# Altium PCB SW6124Demo board.PcbDoc (part 2 of 3)
Units mm, origin at the board's own origin, x right, y up, seen from the top; angles counter-clockwise.
Board outline 64 x 25.82 mm, 4 copper layers (Top Layer, Signal, power, Bottom Layer); 54 components, 46 nets, 211 pads, 291 vias.
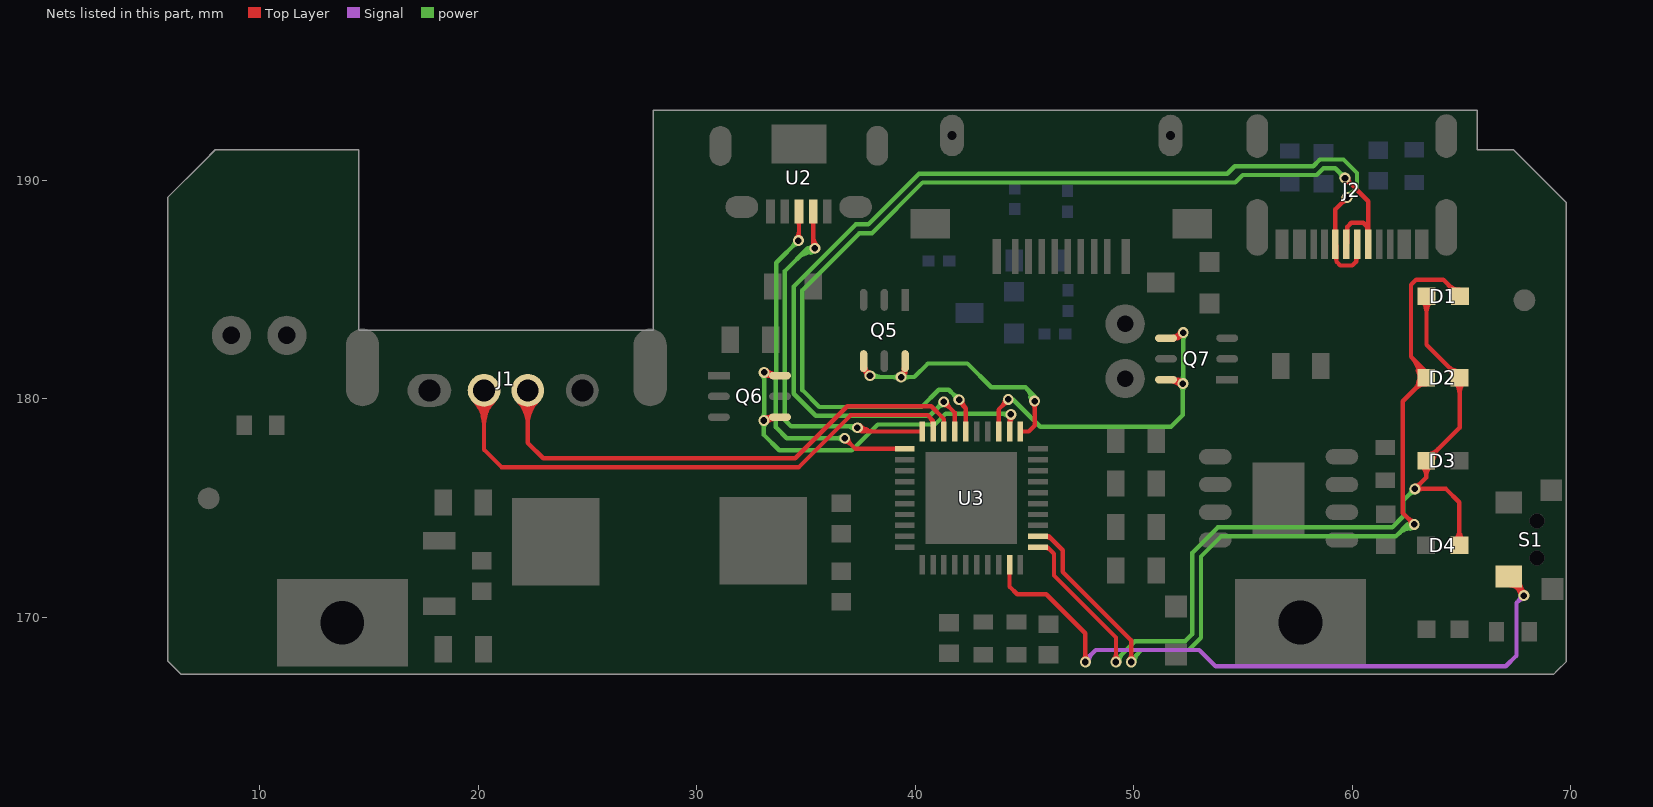
[diagram p4: the nets of this part, all layers, seen from the top]

## Via types
v1: diameter 0.5, hole 0.3, Top Layer to Bottom Layer, tented both sides, 242 vias
v2: diameter 0.508, hole 0.305, Top Layer to Bottom Layer, tented both sides, 49 vias

## Nets (pads, with @x,y where several pads share a name; then routed paths per layer and width w, separated by ;. In a path a pad name is that pad's centre, name@x,y a point inside that pad or via, vN(x,y) a via of type N, cw(c..) or ccw(c..) an arc to the next point about the centre after c; other vN are vias at no path point) (continued)
DMA: J1.2 U3.38 | length 36.1
  Top Layer w0.2: J1.2@22.273,180.379 22.273,177.977 22.98,177.27 34.517,177.27 36.897,179.65 40.736,179.65 41.32,179.066 U3.38@41.32,178.5 ; J1.2@21.813,179.92 cw(c20.703,178.81) 22.273,178.81 ; J1.2@21.813,179.92 cw(c20.703,178.81) 22.273,178.81 ; J1.2@21.813,179.92 cw(c20.703,178.81) 22.273,178.81 ; J1.2@21.954,180.061 cw(c21.186,179.293) 22.273,179.293 ; J1.2@21.954,180.061 cw(c21.186,179.293) 22.273,179.293 ; J1.2@21.954,180.061 cw(c21.186,179.293) 22.273,179.293 ; 22.273,178.81 cw(c23.842,178.81) J1.2@22.732,179.92 ; 22.273,178.81 cw(c23.842,178.81) J1.2@22.732,179.92 ; 22.273,178.81 cw(c23.842,178.81) J1.2@22.732,179.92 ; 22.273,179.293 cw(c23.359,179.293) J1.2@22.591,180.061 ; 22.273,179.293 cw(c23.359,179.293) J1.2@22.591,180.061 ; 22.273,179.293 cw(c23.359,179.293) J1.2@22.591,180.061
DMB: U2.2 U3.40 | length 29
  Top Layer w0.2: U2.2@35.334,188.559 35.334,186.966 v1(35.415,186.885) ; v1(37.36,178.67) 37.53,178.5 U3.40@40.32,178.5 ; 35.334,187.967 cw(c35.576,187.967) 35.405,188.138 ccw(c35.576,187.967) 35.334,187.967 ; 35.334,187.967 ccw(c35.093,187.967) 35.263,188.138 cw(c35.093,187.967) 35.334,187.967 ; v1@37.325,178.635 ccw(c37.65,178.96) 37.65,178.5 ; v1@37.325,178.635 ccw(c37.65,178.96) 37.65,178.5 ; v1@37.325,178.635 ccw(c37.65,178.96) 37.65,178.5 ; v1@37.451,178.551 cw(c37.651,178.288) 37.816,178.574 ; v1@37.451,178.551 cw(c37.651,178.288) 37.816,178.574 ; v1@37.451,178.551 cw(c37.651,178.288) 37.816,178.574 ; v1@37.466,178.776 ccw(c38.133,179.443) 38.133,178.5 ; v1@37.466,178.776 ccw(c38.133,179.443) 38.133,178.5 ; v1@37.466,178.776 ccw(c38.133,179.443) 38.133,178.5 ; 35.334,187.442 ccw(c35.972,187.442) 35.521,186.991 cw(c35.972,187.442) 35.334,187.442
  power w0.2: 34.765,186.561 ccw(c34.543,187.388) v1@35.285,186.96 ; 35.156,186.866 cw(c35.186,186.757) v1@35.284,186.812 ; 35.231,186.686 ccw(c35.134,187.047) v1@35.458,186.86 ; v1(35.415,186.885) 35.084,186.885 ; v1(37.36,178.67) 37.29,178.74 34.325,178.74 34.03,179.035 34.03,180.797 34.04,180.807 34.04,185.841 35.084,186.885 ; 35.084,186.885 cw(c35.084,186.594) 35.302,186.786 ccw(c35.084,186.594) 35.084,186.885 ; 35.084,186.885 ccw(c35.084,187.176) 35.302,186.984 cw(c35.084,187.176) 35.084,186.885 ; 34.594,186.395 cw(c35.415,185.573) 35.415,186.735 ccw(c35.415,185.573) 34.594,186.395 ; 34.935,186.736 cw(c35.415,186.256) 35.415,186.935 ccw(c35.415,186.256) 34.935,186.736 ; 36.829,178.74 cw(c36.829,178.139) 37.254,178.564 ccw(c36.829,178.139) 36.829,178.74
DMC: J2.A7 J2.B7 U3.36 | length 56.6
  Top Layer w0.2: v1(42.01,179.95) 42.01,179.872 42.32,179.562 ; U3.36@42.32,178.5 42.32,179.562 ; v1(59.672,190.097) 60.733,189.036 J2.B7@60.733,187.071 60.683,187.121 60.683,187.871 60.507,188.046 59.958,188.046 59.783,187.871 59.783,187.121 J2.A7@59.733,187.071 ; v1@59.676,189.947 cw(c59.684,189.615) 59.922,189.847 ; v1@59.822,190.093 ccw(c60.154,190.085) 59.922,189.847 ; v1@42.16,179.95 ccw(c42.706,179.948) 42.32,179.562 ; v1@42.16,179.95 ccw(c42.706,179.948) 42.32,179.562 ; v1@42.16,179.95 ccw(c42.706,179.948) 42.32,179.562 ; v1@59.673,189.947 cw(c59.676,189.595) 59.928,189.841 ; v1@59.674,189.947 cw(c59.678,189.599) 59.921,189.848 ccw(c59.678,189.599) v1@59.674,189.947 ; v1@59.822,190.095 ccw(c60.17,190.091) 59.921,189.848 cw(c60.17,190.091) v1@59.822,190.095 ; v1@59.822,190.096 ccw(c60.174,190.093) 59.928,189.841 ; 59.928,189.841 cw(c60.184,190.097) 59.822,190.097 ccw(c60.184,190.097) 59.928,189.841 ; 59.928,189.841 ccw(c59.672,189.585) 59.672,189.947 cw(c59.672,189.585) 59.928,189.841 ; J2.A7@59.697,187.632 ccw(c59.491,187.838) 59.783,187.838 cw(c59.491,187.838) J2.A7@59.697,187.632 ; 60.683,187.838 ccw(c60.974,187.838) 60.768,187.632 cw(c60.974,187.838) 60.683,187.838
  power w0.2: v1(42.01,179.95) 41.812,180.148 41.8,180.148 41.538,180.41 41.082,180.41 40.292,179.62 35.614,179.62 34.84,180.394 34.84,184.967 37.448,187.575 38.026,187.575 40.341,189.89 54.649,189.89 54.995,190.236 58.38,190.236 58.688,190.544 59.225,190.544 v1(59.672,190.097) ; v1@59.522,190.098 ccw(c59.17,190.101) 59.416,190.353 ; v1@59.522,190.099 ccw(c59.174,190.103) 59.423,190.346 ccw(c59.666,190.595) 59.67,190.247 cw(c59.668,190.599) 59.416,190.353 ; 59.416,190.353 cw(c59.16,190.097) 59.522,190.097 ccw(c59.16,190.097) 59.416,190.353 ; 59.416,190.353 ccw(c59.672,190.609) 59.672,190.247 cw(c59.672,190.609) 59.416,190.353 ; 41.733,180.215 ccw(c42.01,180.492) 42.01,180.1 cw(c42.01,180.492) 41.733,180.215 ; 41.763,180.185 cw(c41.527,179.95) 41.86,179.95 ccw(c41.527,179.95) 41.763,180.185
DPA: J1.3 U3.39 | length 38.8
  Top Layer w0.2: J1.3@20.273,180.379 20.273,177.67 21.073,176.87 34.682,176.87 37.062,179.25 40.57,179.25 40.82,179 U3.39@40.82,178.5 ; J1.3@19.813,179.92 cw(c18.703,178.81) 20.273,178.81 ; J1.3@19.813,179.92 cw(c18.703,178.81) 20.273,178.81 ; J1.3@19.813,179.92 cw(c18.703,178.81) 20.273,178.81 ; J1.3@19.954,180.061 cw(c19.186,179.293) 20.273,179.293 ; J1.3@19.954,180.061 cw(c19.186,179.293) 20.273,179.293 ; J1.3@19.954,180.061 cw(c19.186,179.293) 20.273,179.293 ; 20.273,178.81 cw(c21.842,178.81) J1.3@20.732,179.92 ; 20.273,178.81 cw(c21.842,178.81) J1.3@20.732,179.92 ; 20.273,178.81 cw(c21.842,178.81) J1.3@20.732,179.92 ; 20.273,179.293 cw(c21.359,179.293) J1.3@20.591,180.061 ; 20.273,179.293 cw(c21.359,179.293) J1.3@20.591,180.061 ; 20.273,179.293 cw(c21.359,179.293) J1.3@20.591,180.061 ; 40.654,179.166 cw(c40.312,178.825) U3.39@40.795,178.825 ; 40.654,179.166 cw(c40.312,178.825) U3.39@40.795,178.825 ; 40.654,179.166 cw(c40.312,178.825) U3.39@40.795,178.825
DPB: U2.3 U3.1 | length 34.1
  Top Layer w0.2: v1@34.551,187.342 ccw(c34.229,187.664) 34.684,187.664 ; v1(34.657,187.236) 34.684,187.263 U2.3@34.684,188.559 ; 34.684,187.532 ccw(c34.953,187.532) v1@34.763,187.342 ; v1(36.78,178.19) 37.27,177.7 U3.1@39.52,177.7 ; 34.684,187.967 cw(c34.926,187.967) 34.755,188.138 ccw(c34.926,187.967) 34.684,187.967 ; 34.684,187.967 ccw(c34.443,187.967) 34.613,188.138 cw(c34.443,187.967) 34.684,187.967 ; v1@36.78,178.04 cw(c36.78,177.678) 37.036,177.934 ; v1@36.78,178.04 cw(c36.78,177.678) 37.036,177.934 ; v1@36.78,178.04 cw(c36.78,177.678) 37.036,177.934 ; v1@36.78,178.04 cw(c36.78,177.678) 37.036,177.934 cw(c37.292,178.19) v1@36.93,178.19 ; v1@36.78,178.04 cw(c36.78,177.678) 37.036,177.934 ; v1@36.782,178.04 cw(c36.786,177.692) 37.029,177.941 ; v1@36.782,178.04 cw(c36.786,177.692) 37.029,177.941 ; v1@36.781,178.04 cw(c36.784,177.688) 37.036,177.934 ; v1@36.781,178.04 cw(c36.784,177.688) 37.036,177.934 ; v1@36.782,178.04 cw(c36.786,177.692) 37.029,177.941 ; v1@36.782,178.04 cw(c36.786,177.692) 37.029,177.941 ; v1@36.782,178.04 cw(c36.786,177.692) 37.029,177.941 ; v1@36.782,178.04 cw(c36.786,177.692) 37.029,177.941 ; v1@36.781,178.04 cw(c36.784,177.688) 37.036,177.934 ; v1@36.783,178.04 cw(c36.789,177.699) 37.03,177.94 ; v1@36.782,178.04 cw(c36.787,177.695) 37.028,177.942 ; v1@36.782,178.04 cw(c36.787,177.695) 37.028,177.942 ; v1@36.783,178.04 cw(c36.788,177.698) 37.03,177.94 ; v1@36.784,178.04 cw(c36.792,177.708) 37.03,177.94 ; v1@36.784,178.04 cw(c36.792,177.708) 37.03,177.94 ; v1@36.784,178.04 cw(c36.793,177.709) 37.03,177.94 ; v1@36.784,178.04 cw(c36.793,177.709) 37.03,177.94 ; v1@36.784,178.04 cw(c36.792,177.708) 37.03,177.94 ; v1@36.93,178.186 ccw(c37.262,178.178) 37.03,177.94 ; v1@36.93,178.186 ccw(c37.262,178.178) 37.03,177.94 ; v1@36.93,178.186 ccw(c37.261,178.177) 37.03,177.94 ; v1@36.93,178.186 ccw(c37.261,178.177) 37.03,177.94 ; v1@36.93,178.186 ccw(c37.262,178.178) 37.03,177.94 ; v1@36.93,178.188 ccw(c37.278,178.184) 37.029,177.941 ; v1@36.93,178.188 ccw(c37.278,178.184) 37.029,177.941 ; v1@36.93,178.188 ccw(c37.278,178.184) 37.029,177.941 ; v1@36.93,178.188 ccw(c37.278,178.184) 37.029,177.941 ; v1@36.93,178.187 ccw(c37.272,178.182) 37.03,177.94 ; v1@36.93,178.188 ccw(c37.275,178.183) 37.028,177.942 ; v1@36.93,178.188 ccw(c37.275,178.183) 37.028,177.942 ; v1@36.93,178.187 ccw(c37.271,178.181) 37.03,177.94 ; v1@36.93,178.188 ccw(c37.278,178.184) 37.029,177.941 ; v1@36.93,178.188 ccw(c37.278,178.184) 37.029,177.941 ; v1@36.93,178.189 ccw(c37.282,178.186) 37.036,177.934 ; v1@36.93,178.189 ccw(c37.282,178.186) 37.036,177.934 ; v1@36.93,178.189 ccw(c37.282,178.186) 37.036,177.934 ; v1@36.93,178.19 ccw(c37.292,178.19) 37.036,177.934 ; v1@36.93,178.19 ccw(c37.292,178.19) 37.036,177.934 ; v1@36.93,178.19 ccw(c37.292,178.19) 37.036,177.934 ; v1@36.93,178.19 ccw(c37.292,178.19) 37.036,177.934
  power w0.2: v1@34.507,187.234 cw(c34.159,187.23) 34.408,186.987 cw(c34.651,186.738) 34.655,187.086 ccw(c34.653,186.734) 34.401,186.98 ; v1@34.507,187.235 cw(c34.155,187.232) 34.401,186.98 ; v1(34.657,187.236) 33.64,186.219 33.64,180.972 33.63,180.962 33.63,178.69 34.13,178.19 v1(36.78,178.19) ; 34.401,186.98 cw(c34.657,186.724) 34.657,187.086 ccw(c34.657,186.724) 34.401,186.98 ; 34.401,186.98 ccw(c34.145,187.236) 34.507,187.236 cw(c34.145,187.236) 34.401,186.98 ; 36.418,178.19 cw(c36.418,177.828) 36.674,178.084 ccw(c36.418,177.828) 36.418,178.19 ; 36.418,178.19 ccw(c36.418,178.552) 36.674,178.296 cw(c36.418,178.552) 36.418,178.19
DPC: J2.A6 J2.B6 U3.37 | length 69.7
  Top Layer w0.2: v1(41.31,179.86) 41.82,179.35 U3.37@41.82,178.5 ; v1@59.618,189.201 cw(c59.286,189.193) 59.518,188.955 cw(c59.756,188.723) v1@59.764,189.055 ; v1@59.767,189.055 ccw(c59.764,188.703) 59.512,188.949 ; v1(59.768,189.205) 59.233,188.67 J2.B6@59.233,187.071 59.283,187.021 59.283,186.272 59.458,186.096 60.007,186.096 60.183,186.272 J2.A6@60.183,186.468 ; v1@41.31,179.71 cw(c41.31,179.348) 41.566,179.604 ; v1@41.31,179.71 cw(c41.31,179.348) 41.566,179.604 ; v1@41.31,179.71 cw(c41.31,179.348) 41.566,179.604 ; v1@41.31,179.71 cw(c41.31,179.348) 41.566,179.604 ; v1@41.31,179.71 cw(c41.31,179.348) 41.566,179.604 ; v1@41.312,179.71 cw(c41.316,179.362) 41.559,179.611 ; v1@41.312,179.71 cw(c41.316,179.362) 41.559,179.611 ; v1@41.311,179.71 cw(c41.314,179.358) 41.566,179.604 ; v1@41.311,179.71 cw(c41.314,179.358) 41.566,179.604 ; v1@41.312,179.71 cw(c41.316,179.362) 41.559,179.611 ; v1@41.312,179.71 cw(c41.316,179.362) 41.559,179.611 ; v1@41.312,179.71 cw(c41.317,179.365) 41.558,179.612 ; v1@41.312,179.71 cw(c41.317,179.365) 41.558,179.612 ; v1@41.312,179.71 cw(c41.316,179.362) 41.559,179.611 ; v1@41.312,179.71 cw(c41.316,179.362) 41.559,179.611 ; v1@41.311,179.71 cw(c41.314,179.358) 41.566,179.604 ; v1@41.314,179.71 cw(c41.322,179.378) 41.56,179.61 ; v1@41.314,179.71 cw(c41.322,179.378) 41.56,179.61 ; v1@41.314,179.71 cw(c41.323,179.379) 41.56,179.61 ; v1@41.314,179.71 cw(c41.323,179.379) 41.56,179.61 ; v1@41.314,179.71 cw(c41.322,179.378) 41.56,179.61 ; v1@41.46,179.856 ccw(c41.792,179.848) 41.56,179.61 ; v1@41.46,179.856 ccw(c41.792,179.848) 41.56,179.61 ; v1@41.46,179.856 ccw(c41.791,179.847) 41.56,179.61 ; v1@41.46,179.856 ccw(c41.791,179.847) 41.56,179.61 ; v1@41.46,179.856 ccw(c41.792,179.848) 41.56,179.61 ; v1@41.46,179.858 ccw(c41.808,179.854) 41.559,179.611 ; v1@41.46,179.858 ccw(c41.808,179.854) 41.559,179.611 ; v1@41.46,179.858 ccw(c41.808,179.854) 41.559,179.611 ; v1@41.46,179.858 ccw(c41.808,179.854) 41.559,179.611 ; v1@41.46,179.857 ccw(c41.802,179.852) 41.56,179.61 ; v1@41.46,179.858 ccw(c41.805,179.853) 41.558,179.612 ; v1@41.46,179.858 ccw(c41.805,179.853) 41.558,179.612 ; v1@41.46,179.857 ccw(c41.801,179.851) 41.56,179.61 ; v1@41.46,179.858 ccw(c41.808,179.854) 41.559,179.611 ; v1@41.46,179.858 ccw(c41.808,179.854) 41.559,179.611 ; v1@41.46,179.859 ccw(c41.812,179.856) 41.566,179.604 ; v1@41.46,179.859 ccw(c41.812,179.856) 41.566,179.604 ; v1@41.46,179.859 ccw(c41.812,179.856) 41.566,179.604 ; v1@41.46,179.86 ccw(c41.822,179.86) 41.566,179.604 ; v1@41.46,179.86 ccw(c41.822,179.86) 41.566,179.604 ; v1@41.46,179.86 ccw(c41.822,179.86) 41.566,179.604 ; v1@41.46,179.86 ccw(c41.822,179.86) 41.566,179.604 ; v1@41.46,179.86 ccw(c41.822,179.86) 41.566,179.604 ; 41.56,179.61 ccw(c41.319,179.369) 41.313,179.71 cw(c41.318,179.368) 41.56,179.61 ; 59.512,188.949 cw(c59.768,188.693) 59.768,189.055 ccw(c59.768,188.693) 59.512,188.949 ; 59.512,188.949 ccw(c59.256,189.205) 59.618,189.205 cw(c59.256,189.205) 59.512,188.949 ; 59.512,188.949 ccw(c59.266,189.201) v1@59.618,189.204 ; 59.519,188.956 cw(c59.762,188.707) 59.766,189.055 ccw(c59.762,188.707) 59.519,188.956 ; 59.519,188.956 ccw(c59.27,189.199) v1@59.618,189.203 ; 59.519,188.956 ccw(c59.27,189.199) v1@59.618,189.203 ; J2.B6@59.197,186.511 cw(c58.991,186.305) 59.283,186.305 ccw(c58.991,186.305) J2.B6@59.197,186.511 ; 60.183,186.305 cw(c60.474,186.305) 60.268,186.511 ccw(c60.474,186.305) 60.183,186.305
  power w0.2: v1@41.16,179.858 cw(c40.812,179.854) 41.061,179.611 cw(c41.304,179.362) v1@41.308,179.71 ; v1@41.16,179.859 cw(c40.808,179.856) 41.054,179.604 ; v1@41.309,179.71 ccw(c41.306,179.358) 41.054,179.604 ; v1(41.31,179.86) 40.67,179.22 35.448,179.22 34.44,180.228 34.44,185.132 37.283,187.975 37.86,187.975 40.175,190.29 54.278,190.29 54.624,190.636 58.215,190.636 58.523,190.944 59.603,190.944 60.222,190.325 60.222,189.659 v1(59.768,189.205) ; 41.054,179.604 cw(c41.31,179.348) 41.31,179.71 ccw(c41.31,179.348) 41.054,179.604 ; 41.054,179.604 ccw(c40.798,179.86) 41.16,179.86 cw(c40.798,179.86) 41.054,179.604 ; 60.024,189.461 cw(c59.768,189.717) 59.768,189.355 ccw(c59.768,189.717) 60.024,189.461 ; 60.024,189.461 ccw(c60.28,189.205) 59.918,189.205 cw(c60.28,189.205) 60.024,189.461 ; 60.024,189.461 ccw(c60.27,189.209) 59.918,189.206 cw(c60.266,189.211) 60.017,189.454 cw(c59.774,189.703) 59.77,189.355 ccw(c59.772,189.707) 60.024,189.461
GATE_A: Q6.4 Q6.6 U3.32 | length 42.6
  Top Layer w0.2: v1(33.08,179) 33.237,179.157 Q6.4@33.818,179.157 ; v1(33.09,181.2) 33.234,181.056 Q6.6@33.818,181.056 ; v1@33.143,179.136 ccw(c33.253,179.377) Q6.4@33.386,179.148 ; v1@33.225,178.961 cw(c33.492,178.89) Q6.4@33.354,179.129 ; v1@33.225,178.963 cw(c33.414,178.914) Q6.4@33.414,179.109 ; 33.314,179.106 ccw(c33.265,179.288) Q6.4@33.428,179.194 ; 33.324,179.109 cw(c33.369,178.941) Q6.4@33.456,179.092 ; U3.32@44.32,178.5 44.32,179.22 v1(44.38,179.28) ; v1@33.045,179.035 cw(c33.337,178.744) Q6.4@33.337,179.157 ; v1@33.045,179.035 cw(c33.337,178.744) Q6.4@33.337,179.157 ; v1@33.045,179.035 cw(c33.337,178.744) Q6.4@33.337,179.157 ; v1@33.055,181.165 ccw(c33.316,181.426) 33.316,181.056 ; v1@33.055,181.165 ccw(c33.316,181.426) 33.316,181.056 ; v1@33.055,181.165 ccw(c33.316,181.426) 33.316,181.056 ; v1@33.156,179.129 ccw(c33.23,179.254) Q6.4@33.355,179.18 ; v1@33.156,179.129 ccw(c33.23,179.254) Q6.4@33.355,179.18 ; v1@33.156,179.129 ccw(c33.23,179.254) Q6.4@33.355,179.18 ; v1@33.156,179.129 ccw(c33.23,179.254) Q6.4@33.355,179.18 ; v1@33.177,179.114 ccw(c33.367,179.338) Q6.4@33.514,179.084 ; v1@33.177,179.114 ccw(c33.367,179.338) Q6.4@33.514,179.084 ; v1@33.177,179.114 ccw(c33.367,179.338) Q6.4@33.514,179.084 ; v1@33.186,178.894 cw(c33.818,178.264) Q6.4@33.818,179.157 ; v1@33.186,178.894 cw(c33.818,178.264) Q6.4@33.818,179.157 ; v1@33.186,178.894 cw(c33.818,178.264) Q6.4@33.818,179.157 ; v1@33.196,181.306 ccw(c33.799,181.909) Q6.6@33.799,181.056 ; v1@33.196,181.306 ccw(c33.799,181.909) Q6.6@33.799,181.056 ; v1@33.196,181.306 ccw(c33.799,181.909) Q6.6@33.799,181.056 ; v1@33.213,179.123 cw(c33.296,178.815) Q6.4@33.456,179.092 ; v1@33.213,179.123 cw(c33.296,178.815) Q6.4@33.456,179.092 ; v1@33.213,179.123 cw(c33.296,178.815) Q6.4@33.456,179.092 ; v1@33.224,178.96 cw(c33.553,178.868) Q6.4@33.465,179.197 ; v1@33.224,178.96 cw(c33.553,178.868) Q6.4@33.465,179.197 ; v1@33.224,178.96 cw(c33.553,178.868) Q6.4@33.465,179.197 ; v1@33.224,178.96 cw(c33.553,178.868) Q6.4@33.465,179.197 ; v1@33.224,178.96 cw(c33.553,178.868) Q6.4@33.465,179.197 ; v1@33.224,178.96 cw(c33.553,178.868) Q6.4@33.465,179.197 ; v1@33.229,178.987 cw(c33.379,178.974) Q6.4@33.379,179.123 ; v1@33.229,178.987 cw(c33.379,178.974) Q6.4@33.379,179.123 ; v1@33.229,178.987 cw(c33.379,178.974) Q6.4@33.379,179.123 ; v1@33.229,178.987 cw(c33.379,178.974) Q6.4@33.379,179.123 ; v1@33.236,181.236 ccw(c33.525,181.308) Q6.6@33.448,181.02 ; v1@33.236,181.236 ccw(c33.525,181.308) Q6.6@33.448,181.02 ; v1@33.236,181.236 ccw(c33.525,181.308) Q6.6@33.448,181.02 ; v1@33.236,181.236 ccw(c33.525,181.308) Q6.6@33.448,181.02 ; v1@33.236,181.236 ccw(c33.525,181.308) Q6.6@33.448,181.02 ; v1@33.236,181.236 ccw(c33.525,181.308) Q6.6@33.448,181.02 ; 33.312,179.157 cw(c33.312,178.975) Q6.4@33.44,179.103 ; 33.312,179.157 ccw(c33.312,179.338) Q6.4@33.44,179.21 ; 33.312,179.157 ccw(c33.312,179.338) Q6.4@33.44,179.21 ; 33.312,179.157 cw(c33.312,178.975) Q6.4@33.44,179.103 ; 33.312,179.157 ccw(c33.312,179.338) Q6.4@33.44,179.21 ; 33.312,179.157 cw(c33.312,178.975) Q6.4@33.44,179.103 ; 33.312,181.056 cw(c33.312,180.875) Q6.6@33.44,181.003 ; 33.312,181.056 ccw(c33.312,181.238) Q6.6@33.44,181.11 ; 33.312,181.056 ccw(c33.312,181.238) Q6.6@33.44,181.11 ; 33.312,181.056 cw(c33.312,180.875) Q6.6@33.44,181.003 ; 33.312,181.056 ccw(c33.312,181.238) Q6.6@33.44,181.11 ; 33.312,181.056 cw(c33.312,180.875) Q6.6@33.44,181.003 ; U3.32@44.32,178.773 cw(c44.887,178.773) v1@44.486,179.174 ; U3.32@44.32,178.773 cw(c44.887,178.773) v1@44.486,179.174 ; U3.32@44.32,178.773 cw(c44.887,178.773) v1@44.486,179.174 ; v1@33.193,181.091 cw(c33.374,180.899) 33.506,181.127 ccw(c33.374,180.899) v1@33.193,181.091
  power w0.2: v1(33.08,179) 33.08,178.34 33.78,177.64 37.108,177.64 38.288,178.82 40.905,178.82 41.395,179.31 44.35,179.31 v1(44.38,179.28) ; v1@33.08,179.15 33.09,179.16 v1(33.09,181.2) ; v1@32.974,178.894 cw(c32.718,178.638) 33.08,178.638 ; v1@32.974,178.894 cw(c32.718,178.638) 33.08,178.638 ; v1@32.974,178.894 cw(c32.718,178.638) 33.08,178.638 ; v1@32.974,179.106 ccw(c32.694,179.386) 33.09,179.386 ; v1@32.974,179.106 ccw(c32.694,179.386) 33.09,179.386 ; v1@32.974,179.106 ccw(c32.694,179.386) 33.09,179.386 ; v1@32.984,181.094 cw(c32.728,180.838) 33.09,180.838 ; v1@32.984,181.094 cw(c32.728,180.838) 33.09,180.838 ; v1@32.984,181.094 cw(c32.728,180.838) 33.09,180.838 ; 33.08,178.638 cw(c33.442,178.638) v1@33.186,178.894 ; 33.08,178.638 cw(c33.442,178.638) v1@33.186,178.894 ; 33.08,178.638 cw(c33.442,178.638) v1@33.186,178.894 ; 33.09,179.338 ccw(c33.418,179.338) v1@33.186,179.106 ; 33.09,179.338 ccw(c33.418,179.338) v1@33.186,179.106 ; 33.09,179.338 ccw(c33.418,179.338) v1@33.186,179.106 ; 33.09,180.838 cw(c33.452,180.838) v1@33.196,181.094 ; 33.09,180.838 cw(c33.452,180.838) v1@33.196,181.094 ; 33.09,180.838 cw(c33.452,180.838) v1@33.196,181.094 ; 43.945,179.31 cw(c43.945,178.845) v1@44.274,179.174 ; 43.945,179.31 cw(c43.945,178.845) v1@44.274,179.174 ; 43.945,179.31 cw(c43.945,178.845) v1@44.274,179.174 ; 44.09,179.31 ccw(c44.09,179.57) v1@44.274,179.386 ; 44.09,179.31 ccw(c44.09,179.57) v1@44.274,179.386 ; 44.09,179.31 ccw(c44.09,179.57) v1@44.274,179.386
GATE_B: Q5.4 Q5.6 U3.31 | length 30.3
  Top Layer w0.2: Q5.4@37.605,181.33 cw(c37.374,180.93) v1@37.821,181.049 ; Q5.4@37.614,181.326 cw(c37.487,181.022) v1@37.805,181.107 ; Q5.4@37.643,181.32 cw(c37.643,181.105) 37.795,181.257 ; Q5.4@37.643,181.72 37.643,181.34 v1(37.934,181.049) ; Q5.4@37.643,181.345 cw(c37.5,181.096) v1@37.785,181.065 ; Q5.4@37.673,181.305 ccw(c37.868,181.418) 37.907,181.197 cw(c37.873,181.398) Q5.4@37.696,181.296 ; Q5.4@37.717,181.409 ccw(c38.03,181.471) v1@37.87,181.194 ; Q5.4@37.74,181.289 cw(c37.67,181.168) v1@37.797,181.111 ; Q5.4@37.753,181.311 cw(c37.619,181.177) v1@37.795,181.105 ; v1@37.784,181.053 ccw(c37.452,181.061) 37.684,181.299 ccw(c37.922,181.531) v1@37.93,181.199 ; v1@37.933,181.199 cw(c37.93,181.551) Q5.4@37.678,181.305 ; Q5.6@39.543,181.72 39.543,181.175 ; U3.31@44.82,178.5 45.2,178.5 45.47,178.77 v1@45.47,179.7 ; Q5.4@37.678,181.305 cw(c37.422,181.049) 37.784,181.049 ccw(c37.422,181.049) Q5.4@37.678,181.305 ; Q5.4@37.678,181.305 ccw(c37.934,181.561) 37.934,181.199 cw(c37.934,181.561) Q5.4@37.678,181.305 ; Q5.4@37.678,181.305 cw(c37.432,181.053) v1@37.784,181.05 ; Q5.4@37.685,181.298 cw(c37.436,181.055) v1@37.784,181.051 ; Q5.4@37.685,181.298 cw(c37.436,181.055) v1@37.784,181.051 ; Q5.4@37.685,181.298 ccw(c37.928,181.547) 37.932,181.199 cw(c37.928,181.547) Q5.4@37.685,181.298 ; Q5.4@37.716,181.336 ccw(c37.955,181.474) v1@37.941,181.199 ; Q5.4@37.716,181.336 ccw(c37.955,181.474) v1@37.941,181.199 ; Q5.4@37.716,181.336 ccw(c37.955,181.474) v1@37.941,181.199 ; 37.768,181.245 cw(c37.589,181.141) v1@37.789,181.088 ; 37.768,181.245 cw(c37.589,181.141) v1@37.789,181.088 ; 37.768,181.245 cw(c37.589,181.141) v1@37.789,181.088 ; v1(39.358,180.99) ccw(c39.063,181.285) 39.47,181.378 cw(c39.063,181.285) v1(39.358,180.99) ; v1(39.358,180.99) 39.543,181.175 ; 39.543,181.175 cw(c39.435,181.283) 39.396,181.135 ccw(c39.435,181.283) 39.543,181.175 ; 39.543,181.175 ccw(c39.651,181.067) 39.503,181.028 cw(c39.651,181.067) 39.543,181.175 ; 39.543,181.214 cw(c39.724,181.214) 39.596,181.342 ccw(c39.724,181.214) 39.543,181.214 ; 39.543,181.214 ccw(c39.362,181.214) 39.49,181.342 cw(c39.362,181.214) 39.543,181.214 ; v1@45.364,179.784 cw(c45.108,179.528) 45.47,179.528 ; v1@45.364,179.784 cw(c45.108,179.528) 45.47,179.528 ; v1@45.364,179.784 cw(c45.108,179.528) 45.47,179.528 ; 45.47,179.528 cw(c45.832,179.528) v1@45.576,179.784 ; 45.47,179.528 cw(c45.832,179.528) v1@45.576,179.784 ; 45.47,179.528 cw(c45.832,179.528) v1@45.576,179.784 ; Q5.4@37.718,181.395 ccw(c38.032,181.395) 37.81,181.173 cw(c38.032,181.395) Q5.4@37.718,181.395
  power w0.2: v1(37.934,181.049) 37.993,180.99 v1(39.358,180.99) 39.965,180.99 40.585,181.61 42.394,181.61 43.483,180.52 45.052,180.52 45.47,180.102 v1(45.47,179.89) ; 38.996,180.99 cw(c38.996,180.628) 39.252,180.884 ccw(c38.996,180.628) 38.996,180.99 ; 38.996,180.99 ccw(c38.996,181.352) 39.252,181.096 cw(c38.996,181.352) 38.996,180.99 ; 39.72,180.99 cw(c39.72,181.352) 39.464,181.096 ccw(c39.72,181.352) 39.72,180.99 ; 39.72,180.99 ccw(c39.72,180.628) 39.464,180.884 cw(c39.72,180.628) 39.72,180.99 ; 45.064,180.508 cw(c44.446,179.89) v1@45.32,179.89 ; 45.064,180.508 cw(c44.446,179.89) v1@45.32,179.89 ; 45.064,180.508 cw(c44.446,179.89) v1@45.32,179.89 ; 45.271,180.074 ccw(c45.632,180.171) v1@45.445,179.847 ; 45.271,180.074 ccw(c45.632,180.171) v1@45.445,179.847 ; 45.271,180.074 ccw(c45.632,180.171) v1@45.445,179.847 ; 45.405,180.167 cw(c45.129,179.89) v1@45.52,179.89 ; 45.405,180.167 cw(c45.129,179.89) v1@45.52,179.89 ; 45.405,180.167 cw(c45.129,179.89) v1@45.52,179.89 ; v1@38.04,181.155 ccw(c38.439,181.554) 38.439,180.99 cw(c38.439,181.554) v1@38.04,181.155
GATE_C: Q7.4 Q7.6 U3.33 | length 42.6
  Top Layer w0.2: U3.33@43.82,178.5 43.82,179.5 v1@44.275,179.955 ; Q7.4@51.48,182.77 52.02,182.77 ; Q7.4@51.834,182.839 ccw(c51.906,183.007) 52.027,182.87 ; Q7.6@51.87,180.908 ccw(c52.04,181.005) 51.989,180.816 ; Q7.4@51.911,182.856 cw(c52.092,182.495) v1@52.222,182.878 ; Q7.4@51.926,182.82 ccw(c51.752,183.167) v1@52.126,183.061 ; 51.971,182.886 ccw(c51.831,183.166) v1@52.128,183.067 ; 51.979,182.803 cw(c52.14,182.712) v1@52.212,182.882 ; 52.01,182.862 ccw(c51.921,183.041) v1@52.12,183.029 ; v1@52.065,182.934 cw(c51.83,183.198) Q7.4@51.809,182.845 ; v1(52.25,180.69) 52.07,180.87 ; 43.983,179.663 ccw(c43.675,179.97) v1@44.11,179.97 ; 43.983,179.663 ccw(c43.675,179.97) v1@44.11,179.97 ; 43.983,179.663 ccw(c43.675,179.97) v1@44.11,179.97 ; 44.055,179.735 cw(c44.26,179.53) v1@44.26,179.82 ; 44.055,179.735 cw(c44.26,179.53) v1@44.26,179.82 ; 44.055,179.735 cw(c44.26,179.53) v1@44.26,179.82 ; Q7.6@51.48,180.87 cw(c51.48,179.957) v1@52.141,180.587 ; Q7.6@51.48,180.87 cw(c51.48,179.957) v1@52.141,180.587 ; Q7.6@51.48,180.87 cw(c51.48,179.957) v1@52.141,180.587 ; Q7.6@51.48,180.87 52.07,180.87 ; Q7.4@51.809,182.845 ccw(c51.845,183.445) v1(52.27,183.02) ; Q7.4@51.809,182.845 ccw(c51.845,183.445) v1(52.27,183.02) ; Q7.4@51.809,182.845 ccw(c51.845,183.445) v1(52.27,183.02) ; Q7.6@51.843,180.805 cw(c51.996,180.54) v1@52.075,180.836 ; Q7.6@51.843,180.805 cw(c51.996,180.54) v1@52.075,180.836 ; Q7.6@51.843,180.805 cw(c51.996,180.54) v1@52.075,180.836 ; Q7.6@51.858,180.817 cw(c51.986,180.689) 51.986,180.87 ; Q7.6@51.858,180.817 cw(c51.986,180.689) 51.986,180.87 ; Q7.6@51.858,180.817 cw(c51.986,180.689) 51.986,180.87 ; Q7.6@51.858,180.923 ccw(c51.986,181.051) 51.986,180.87 ; Q7.6@51.858,180.923 ccw(c51.986,181.051) 51.986,180.87 ; Q7.6@51.858,180.923 ccw(c51.986,181.051) 51.986,180.87 ; Q7.4@51.858,182.717 cw(c51.986,182.589) 51.986,182.77 ; Q7.4@51.858,182.717 cw(c51.986,182.589) 51.986,182.77 ; Q7.4@51.858,182.717 cw(c51.986,182.589) 51.986,182.77 ; Q7.4@51.858,182.823 ccw(c51.986,182.951) 51.986,182.77 ; Q7.4@51.858,182.823 ccw(c51.986,182.951) 51.986,182.77 ; Q7.4@51.858,182.823 ccw(c51.986,182.951) 51.986,182.77 ; Q7.4@51.868,182.729 cw(c52.225,182.493) v1@52.139,182.913 ; Q7.4@51.868,182.729 cw(c52.225,182.493) v1@52.139,182.913 ; Q7.4@51.868,182.729 cw(c52.225,182.493) v1@52.139,182.913 ; Q7.6@51.916,180.836 cw(c51.916,180.65) v1@52.101,180.672 ; Q7.6@51.916,180.836 cw(c51.916,180.65) v1@52.101,180.672 ; Q7.6@51.916,180.836 cw(c51.916,180.65) v1@52.101,180.672 ; Q7.6@51.916,180.836 cw(c51.916,180.65) v1@52.101,180.672 ; Q7.4@51.916,182.801 ccw(c51.735,183.161) v1@52.125,183.058 ; Q7.4@51.916,182.801 ccw(c51.735,183.161) v1@52.125,183.058 ; Q7.4@51.916,182.801 ccw(c51.735,183.161) v1@52.125,183.058 ; Q7.4@51.916,182.801 ccw(c51.735,183.161) v1@52.125,183.058 ; Q7.6@51.947,180.87 cw(c51.947,180.401) v1@52.286,180.724 ; Q7.6@51.947,180.87 cw(c51.947,180.401) v1@52.286,180.724 ; Q7.6@51.947,180.87 cw(c51.947,180.401) v1@52.286,180.724 ; 52,182.864 cw(c52.124,182.649) v1@52.215,182.88 ; 52,182.864 ccw(c51.876,183.079) v1@52.122,183.042 ; 52,182.864 cw(c52.124,182.649) v1@52.215,182.88 ; 52,182.864 ccw(c51.876,183.079) v1@52.122,183.042 ; 52,182.864 ccw(c51.876,183.079) v1@52.122,183.042 ; 52,182.864 cw(c52.124,182.649) v1@52.215,182.88 ; 52,182.864 ccw(c51.876,183.079) v1@52.122,183.042 ; 52,182.864 cw(c52.124,182.649) v1@52.215,182.88 ; 52,182.864 ccw(c51.876,183.079) v1@52.122,183.042 ; 52,182.864 cw(c52.124,182.649) v1@52.215,182.88 ; 52,182.864 ccw(c51.876,183.079) v1@52.122,183.042 ; 52,182.864 cw(c52.124,182.649) v1@52.215,182.88 ; 52.02,182.77 cw(c52.262,182.528) v1@52.267,182.87 ; 52.02,182.77 ccw(c51.778,183.012) v1@52.12,183.017 ; 52.02,182.77 ccw(c51.778,183.012) v1@52.12,183.017 ; 52.02,182.77 cw(c52.262,182.528) v1@52.267,182.87 ; 52.02,182.77 ccw(c51.778,183.012) v1@52.12,183.017 ; 52.02,182.77 cw(c52.262,182.528) v1@52.267,182.87 ; 52.02,182.77 v1(52.27,183.02) ; 52.043,182.865 cw(c52.149,182.654) v1@52.223,182.878 ; 52.043,182.865 cw(c52.149,182.654) v1@52.223,182.878 ; 52.043,182.865 cw(c52.149,182.654) v1@52.223,182.878 ; 52.043,182.865 cw(c52.149,182.654) v1@52.223,182.878 ; 52.07,180.87 cw(c51.97,180.77) v1@52.106,180.731 ; 52.07,180.87 ccw(c52.17,180.97) v1@52.209,180.834 ; 52.07,180.87 ccw(c52.17,180.97) v1@52.209,180.834 ; 52.07,180.87 cw(c51.97,180.77) v1@52.106,180.731 ; 52.07,180.87 ccw(c52.17,180.97) v1@52.209,180.834 ; 52.07,180.87 cw(c51.97,180.77) v1@52.106,180.731 ; v1@52.223,182.878 ccw(c52.135,182.614) 52.011,182.862 cw(c52.135,182.614) v1@52.223,182.878 ; Q7.6@51.801,180.794 ccw(c51.969,181.068) 52.161,180.81 cw(c51.969,181.068) Q7.6@51.801,180.794
  power w0.2: v1(44.26,179.97) 44.468,179.97 45.728,178.71 50.62,178.71 51.71,178.71 52.25,179.25 v1(52.25,180.69) 52.27,180.71 v1(52.27,183.02) ; v1@52.144,180.584 cw(c51.888,180.328) 52.25,180.328 ; v1@52.144,180.584 cw(c51.888,180.328) 52.25,180.328 ; v1@52.144,180.584 cw(c51.888,180.328) 52.25,180.328 ; v1@52.144,180.796 ccw(c51.84,181.1) 52.27,181.1 ; v1@52.144,180.796 ccw(c51.84,181.1) 52.27,181.1 ; v1@52.144,180.796 ccw(c51.84,181.1) 52.27,181.1 ; v1@52.164,182.914 cw(c51.908,182.658) 52.27,182.658 ; v1@52.164,182.914 cw(c51.908,182.658) 52.27,182.658 ; v1@52.164,182.914 cw(c51.908,182.658) 52.27,182.658 ; 52.25,180.328 cw(c52.612,180.328) v1@52.356,180.584 ; 52.25,180.328 cw(c52.612,180.328) v1@52.356,180.584 ; 52.25,180.328 cw(c52.612,180.328) v1@52.356,180.584 ; 52.27,181.004 ccw(c52.564,181.004) v1@52.356,180.796 ; 52.27,181.004 ccw(c52.564,181.004) v1@52.356,180.796 ; 52.27,181.004 ccw(c52.564,181.004) v1@52.356,180.796 ; 52.27,182.658 cw(c52.632,182.658) v1@52.376,182.914 ; 52.27,182.658 cw(c52.632,182.658) v1@52.376,182.914 ; 52.27,182.658 cw(c52.632,182.658) v1@52.376,182.914
KEY: S1.1 U3.19 | length 57.6
  Top Layer w0.2: U3.19@44.32,172.4 44.32,171.401 44.671,171.05 46.004,171.05 47.79,169.264 v1(47.79,167.95) ; S1.1@67.162,171.856 v1@67.86,171.158 ; v1(67.86,170.99) v1@67.86,171.158 ; v1@47.684,168.056 ccw(c47.428,168.312) 47.79,168.312 ; v1@47.684,168.056 ccw(c47.428,168.312) 47.79,168.312 ; v1@47.684,168.056 ccw(c47.428,168.312) 47.79,168.312 ; 47.79,168.312 ccw(c48.152,168.312) v1@47.896,168.056 ; 47.79,168.312 ccw(c48.152,168.312) v1@47.896,168.056 ; 47.79,168.312 ccw(c48.152,168.312) v1@47.896,168.056 ; S1.1@67.262,171.456 cw(c67.262,170.732) 67.774,171.244 ; S1.1@67.262,171.456 cw(c67.262,170.732) 67.774,171.244 ; S1.1@67.262,171.456 cw(c67.262,170.732) 67.774,171.244 ; S1.1@67.262,171.856 cw(c67.069,171.222) S1.1@67.709,171.394 ; S1.1@67.262,171.856 cw(c67.069,171.222) S1.1@67.709,171.394 ; S1.1@67.262,171.856 cw(c67.069,171.222) S1.1@67.709,171.394 ; S1.1@67.262,171.856 cw(c67.069,171.222) S1.1@67.709,171.394 ; S1.1@67.46,171.824 ccw(c67.902,171.75) S1.1@67.585,171.434 ; S1.1@67.46,171.824 ccw(c67.902,171.75) S1.1@67.585,171.434 ; S1.1@67.46,171.824 ccw(c67.902,171.75) S1.1@67.585,171.434 ; S1.1@67.485,171.534 cw(c66.941,170.99) v1@67.71,170.99 ; S1.1@67.485,171.534 cw(c66.941,170.99) v1@67.71,170.99 ; S1.1@67.485,171.534 cw(c66.941,170.99) v1@67.71,170.99 ; S1.1@67.657,171.791 ccw(c68.374,171.672) v1@67.86,171.158 ; S1.1@67.657,171.791 ccw(c68.374,171.672) v1@67.86,171.158 ; S1.1@67.657,171.791 ccw(c68.374,171.672) v1@67.86,171.158 ; v1@67.693,171.173 ccw(c67.199,170.888) 67.236,171.457 cw(c67.199,170.888) v1@67.693,171.173 ; v1@67.693,171.173 cw(c68.271,171.507) 67.64,171.725 ccw(c68.271,171.507) v1@67.693,171.173 ; S1.1@67.696,171.442 cw(c67.31,171.219) v1@67.722,171.048 ; S1.1@67.696,171.442 cw(c67.31,171.219) v1@67.722,171.048 ; S1.1@67.696,171.442 cw(c67.31,171.219) v1@67.722,171.048 ; S1.1@67.696,171.442 cw(c67.31,171.219) v1@67.722,171.048 ; S1.1@67.696,171.442 cw(c67.31,171.219) v1@67.722,171.048 ; S1.1@67.696,171.442 cw(c67.31,171.219) v1@67.722,171.048 ; v1@67.71,170.99 ccw(c67.309,170.99) 67.593,171.274 cw(c67.309,170.99) v1@67.71,170.99 ; S1.1@67.585,171.576 ccw(c68.311,171.771) 67.935,171.12 cw(c68.311,171.771) S1.1@67.585,171.576 ; 67.631,171.235 ccw(c67.86,171.463) 67.86,171.14 cw(c67.86,171.463) 67.631,171.235 ; 67.663,171.166 ccw(c68.006,171.258) 67.836,170.946 cw(c68.006,171.258) 67.663,171.166
  Signal w0.2: v1(47.79,167.95) 47.79,168.028 48.262,168.5 53.002,168.5 53.751,167.752 67.032,167.752 67.523,168.243 67.523,170.653 v1(67.86,170.99) ; v1@47.94,167.95 cw(c48.49,167.95) 48.101,168.339 ; v1@47.94,167.95 cw(c48.49,167.95) 48.101,168.339 ; v1@47.94,167.95 cw(c48.49,167.95) 48.101,168.339 ; 67.604,170.734 cw(c67.86,170.478) v1@67.86,170.84 ; 67.604,170.734 ccw(c67.348,170.99) v1@67.71,170.99 ; 67.604,170.734 cw(c67.856,170.488) v1@67.859,170.84 ; 67.604,170.734 ccw(c67.358,170.986) v1@67.71,170.989 ; 67.604,170.734 ccw(c67.348,170.99) v1@67.71,170.99 ; 67.604,170.734 cw(c67.86,170.478) v1@67.86,170.84 ; 67.604,170.734 ccw(c67.358,170.986) v1@67.71,170.989 ; 67.604,170.734 cw(c67.856,170.488) v1@67.859,170.84 ; 67.604,170.734 ccw(c67.348,170.99) v1@67.71,170.99 ; 67.604,170.734 cw(c67.86,170.478) v1@67.86,170.84 ; 67.604,170.734 ccw(c67.348,170.99) v1@67.71,170.99 ; 67.604,170.734 cw(c67.86,170.478) v1@67.86,170.84 ; 67.604,170.734 cw(c67.856,170.488) v1@67.859,170.84 ; 67.604,170.734 ccw(c67.358,170.986) v1@67.71,170.989 ; 67.604,170.734 ccw(c67.348,170.99) v1@67.71,170.99 ; 67.604,170.734 cw(c67.86,170.478) v1@67.86,170.84 ; 67.611,170.741 ccw(c67.362,170.984) v1@67.71,170.988 ; 67.611,170.741 ccw(c67.362,170.984) v1@67.71,170.988 ; 67.611,170.741 ccw(c67.362,170.984) v1@67.71,170.988 ; 67.611,170.741 cw(c67.854,170.492) v1@67.858,170.84 ; 67.611,170.741 cw(c67.854,170.492) v1@67.858,170.84 ; 67.611,170.741 cw(c67.854,170.492) v1@67.858,170.84
LED1: D1.2 D2.1 D3.2 D4.1 U3.21 | length 89
  Top Layer w0.2: U3.21@45.62,173.2 46.054,173.2 46.354,172.9 46.354,171.908 49.19,169.072 v1(49.19,167.95) ; D1.2@63.404,184.686 63.404,182.47 D2.1@64.916,180.958 64.916,178.672 D3.2@63.392,177.148 63.392,176.392 v1(62.87,175.87) 64.293,175.87 64.903,175.26 D4.1@64.903,173.281 ; U3.21@45.945,173.175 cw(c45.945,172.853) 46.173,173.081 ; U3.21@45.945,173.175 cw(c45.945,172.853) 46.173,173.081 ; U3.21@45.945,173.175 cw(c45.945,172.853) 46.173,173.081 ; v1@49.084,168.056 ccw(c48.828,168.312) 49.19,168.312 ; v1@49.084,168.056 ccw(c48.828,168.312) 49.19,168.312 ; v1@49.084,168.056 ccw(c48.828,168.312) 49.19,168.312 ; 49.19,168.312 ccw(c49.552,168.312) v1@49.296,168.056 ; 49.19,168.312 ccw(c49.552,168.312) v1@49.296,168.056 ; 49.19,168.312 ccw(c49.552,168.312) v1@49.296,168.056 ; v1@62.87,176.02 ccw(c62.87,176.382) 63.126,176.126 ; v1@62.87,176.02 ccw(c62.87,176.382) 63.126,176.126 ; v1@62.87,176.02 ccw(c62.87,176.382) 63.126,176.126 ; v1@62.87,176.02 ccw(c62.87,176.382) 63.126,176.126 ccw(c63.382,175.87) v1@63.02,175.87 ; v1@62.87,176.02 ccw(c62.87,176.382) 63.126,176.126 ; v1@62.871,176.02 ccw(c62.874,176.372) 63.126,176.126 ; v1@62.871,176.02 ccw(c62.874,176.372) 63.126,176.126 ; v1@62.871,176.02 ccw(c62.874,176.372) 63.126,176.126 ; v1@62.872,176.02 ccw(c62.876,176.368) 63.119,176.119 ; v1@62.872,176.02 ccw(c62.876,176.368) 63.119,176.119 ; v1@62.872,176.02 ccw(c62.877,176.365) 63.118,176.118 ; v1@62.872,176.02 ccw(c62.877,176.365) 63.118,176.118 ; v1@62.873,176.02 ccw(c62.879,176.361) 63.12,176.12 ; v1@62.872,176.02 ccw(c62.876,176.368) 63.119,176.119 ; v1@62.872,176.02 ccw(c62.876,176.368) 63.119,176.119 ; v1@62.873,176.02 ccw(c62.878,176.362) 63.12,176.12 ; v1@62.872,176.02 ccw(c62.876,176.368) 63.119,176.119 ; v1@62.872,176.02 ccw(c62.876,176.368) 63.119,176.119 ; v1@62.874,176.02 ccw(c62.882,176.352) 63.12,176.12 ; v1@62.874,176.02 ccw(c62.882,176.352) 63.12,176.12 ; v1@62.874,176.02 ccw(c62.882,176.352) 63.12,176.12 ; v1@62.874,176.02 ccw(c62.883,176.351) 63.12,176.12 ; v1@62.874,176.02 ccw(c62.883,176.351) 63.12,176.12 ; v1@62.976,175.764 cw(c63.232,175.508) 63.232,175.87 ; v1@62.976,175.764 cw(c63.232,175.508) 63.232,175.87 ; v1@62.976,175.764 cw(c63.232,175.508) 63.232,175.87 ; v1@62.976,175.976 ccw(c63.232,176.232) 63.232,175.87 ; v1@62.976,175.976 ccw(c63.232,176.232) 63.232,175.87 ; v1@62.976,175.976 ccw(c63.232,176.232) 63.232,175.87 ; v1@63.02,175.87 cw(c63.382,175.87) 63.126,176.126 ; v1@63.02,175.87 cw(c63.382,175.87) 63.126,176.126 ; v1@63.02,175.87 cw(c63.382,175.87) 63.126,176.126 ; v1@63.02,175.87 cw(c63.382,175.87) 63.126,176.126 ; v1@63.02,175.871 cw(c63.372,175.874) 63.126,176.126 ; v1@63.02,175.872 cw(c63.368,175.876) 63.119,176.119 ; v1@63.02,175.872 cw(c63.368,175.876) 63.119,176.119 ; v1@63.02,175.872 cw(c63.368,175.876) 63.119,176.119 ; v1@63.02,175.872 cw(c63.368,175.876) 63.119,176.119 ; v1@63.02,175.872 cw(c63.368,175.876) 63.119,176.119 ; v1@63.02,175.872 cw(c63.368,175.876) 63.119,176.119 ; v1@63.02,175.871 cw(c63.372,175.874) 63.126,176.126 ; v1@63.02,175.871 cw(c63.372,175.874) 63.126,176.126 ; v1@63.02,175.873 cw(c63.362,175.878) 63.12,176.12 ; v1@63.02,175.873 cw(c63.361,175.879) 63.12,176.12 ; v1@63.02,175.872 cw(c63.365,175.877) 63.118,176.118 ; v1@63.02,175.872 cw(c63.365,175.877) 63.118,176.118 ; v1@63.02,175.874 cw(c63.352,175.882) 63.12,176.12 ; v1@63.02,175.874 cw(c63.351,175.883) 63.12,176.12 ; v1@63.02,175.874 cw(c63.351,175.883) 63.12,176.12 ; v1@63.02,175.874 cw(c63.352,175.882) 63.12,176.12 ; v1@63.02,175.874 cw(c63.352,175.882) 63.12,176.12 ; D3.2@63.18,176.936 cw(c62.667,176.424) 63.392,176.424 ; D3.2@63.18,176.936 cw(c62.667,176.424) 63.392,176.424 ; D3.2@63.18,176.936 cw(c62.667,176.424) 63.392,176.424 ; D1.2@63.192,184.474 cw(c62.68,183.962) 63.404,183.962 ; D1.2@63.192,184.474 cw(c62.68,183.962) 63.404,183.962 ; D1.2@63.192,184.474 cw(c62.68,183.962) 63.404,183.962 ; 63.392,176.424 cw(c64.116,176.424) D3.2@63.604,176.936 ; 63.392,176.424 cw(c64.116,176.424) D3.2@63.604,176.936 ; 63.392,176.424 cw(c64.116,176.424) D3.2@63.604,176.936 ; D3.2@63.402,177.448 ccw(c63.402,178.149) 63.897,177.653 ; D3.2@63.402,177.448 ccw(c63.402,178.149) 63.897,177.653 ; D3.2@63.402,177.448 ccw(c63.402,178.149) 63.897,177.653 ; 63.404,183.962 cw(c64.129,183.962) D1.2@63.616,184.474 ; 63.404,183.962 cw(c64.129,183.962) D1.2@63.616,184.474 ; 63.404,183.962 cw(c64.129,183.962) D1.2@63.616,184.474 ; D3.2@63.423,177.051 ccw(c63.327,177.49) D3.2@63.762,177.374 ; D3.2@63.423,177.051 ccw(c63.327,177.49) D3.2@63.762,177.374 ; D3.2@63.423,177.051 ccw(c63.327,177.49) D3.2@63.762,177.374 ; D3.2@63.702,177.148 cw(c64.45,177.148) 63.921,177.678 ; D3.2@63.702,177.148 cw(c64.45,177.148) 63.921,177.678 ; D3.2@63.702,177.148 cw(c64.45,177.148) 63.921,177.678 ; 64.386,181.488 cw(c63.857,180.958) D2.1@64.606,180.958 ; 64.386,181.488 cw(c63.857,180.958) D2.1@64.606,180.958 ; 64.386,181.488 cw(c63.857,180.958) D2.1@64.606,180.958 ; 64.411,181.463 ccw(c64.906,181.959) D2.1@64.906,181.258 ; 64.411,181.463 ccw(c64.906,181.959) D2.1@64.906,181.258 ; 64.411,181.463 ccw(c64.906,181.959) D2.1@64.906,181.258 ; D2.1@64.545,181.184 ccw(c64.98,181.3) D2.1@64.884,180.861 ; D2.1@64.545,181.184 ccw(c64.98,181.3) D2.1@64.884,180.861 ; D2.1@64.545,181.184 ccw(c64.98,181.3) D2.1@64.884,180.861 ; D4.1@64.691,173.493 ccw(c64.179,174.006) 64.903,174.006 ; D4.1@64.691,173.493 ccw(c64.179,174.006) 64.903,174.006 ; D4.1@64.691,173.493 ccw(c64.179,174.006) 64.903,174.006 ; D2.1@64.704,180.746 cw(c64.191,180.234) 64.916,180.234 ; D2.1@64.704,180.746 cw(c64.191,180.234) 64.916,180.234 ; D2.1@64.704,180.746 cw(c64.191,180.234) 64.916,180.234 ; 64.903,174.006 ccw(c65.627,174.006) D4.1@65.115,173.493 ; 64.903,174.006 ccw(c65.627,174.006) D4.1@65.115,173.493 ; 64.903,174.006 ccw(c65.627,174.006) D4.1@65.115,173.493 ; 64.916,180.234 cw(c65.64,180.234) D2.1@65.128,180.746 ; 64.916,180.234 cw(c65.64,180.234) D2.1@65.128,180.746 ; 64.916,180.234 cw(c65.64,180.234) D2.1@65.128,180.746
  power w0.2: v1(49.19,167.95) 49.19,168.028 50.062,168.9 52.354,168.9 52.68,169.226 52.68,172.941 53.849,174.11 61.834,174.11 62.34,174.616 62.34,175.34 v1(62.87,175.87) ; v1@49.34,167.95 cw(c49.89,167.95) 49.501,168.339 ; v1@49.34,167.95 cw(c49.89,167.95) 49.501,168.339 ; v1@49.34,167.95 cw(c49.89,167.95) 49.501,168.339 ; 62.614,175.614 cw(c62.87,175.358) v1@62.87,175.72 ; 62.614,175.614 ccw(c62.358,175.87) v1@62.72,175.87 ; 62.614,175.614 ccw(c62.368,175.866) v1@62.72,175.869 ; 62.614,175.614 cw(c62.866,175.368) v1@62.869,175.72 ; 62.614,175.614 ccw(c62.358,175.87) v1@62.72,175.87 ; 62.614,175.614 cw(c62.87,175.358) v1@62.87,175.72 ; 62.614,175.614 cw(c62.866,175.368) v1@62.869,175.72 ; 62.614,175.614 cw(c62.87,175.358) v1@62.87,175.72 ; 62.614,175.614 cw(c62.866,175.368) v1@62.869,175.72 ; 62.614,175.614 ccw(c62.368,175.866) v1@62.72,175.869 ; 62.614,175.614 ccw(c62.358,175.87) v1@62.72,175.87 ; 62.614,175.614 ccw(c62.368,175.866) v1@62.72,175.869 ; 62.614,175.614 ccw(c62.358,175.87) v1@62.72,175.87 ; 62.614,175.614 cw(c62.87,175.358) v1@62.87,175.72 ; 62.621,175.621 cw(c62.864,175.372) v1@62.868,175.72 ; 62.621,175.621 ccw(c62.372,175.864) v1@62.72,175.868 ; 62.621,175.621 ccw(c62.372,175.864) v1@62.72,175.868 ; 62.621,175.621 ccw(c62.372,175.864) v1@62.72,175.868 ; 62.621,175.621 cw(c62.864,175.372) v1@62.868,175.72 ; 62.621,175.621 cw(c62.864,175.372) v1@62.868,175.72 ; v1@62.72,175.87 cw(c62.358,175.87) 62.614,175.614 cw(c62.87,175.358) v1@62.87,175.72
LED2: D1.1 D2.2 U3.22 | length 81.5
  Top Layer w0.2: U3.22@45.62,173.7 46.119,173.7 46.754,173.065 46.754,172.074 49.89,168.938 v1(49.89,167.95) ; v1@62.69,174.253 ccw(c62.349,174.259) 62.59,174.5 ; v1(62.84,174.25) 62.32,174.77 62.32,179.887 D2.2@63.392,180.958 63.392,181.219 62.694,181.917 ; D1.1@64.928,184.686 64.166,185.448 62.932,185.448 62.694,185.21 62.694,181.917 ; U3.22@45.945,173.675 cw(c45.945,173.194) 46.285,173.534 ; U3.22@45.945,173.675 cw(c45.945,173.194) 46.285,173.534 ; U3.22@45.945,173.675 cw(c45.945,173.194) 46.285,173.534 ; v1@49.784,168.056 ccw(c49.528,168.312) 49.89,168.312 ; v1@49.784,168.056 ccw(c49.528,168.312) 49.89,168.312 ; v1@49.784,168.056 ccw(c49.528,168.312) 49.89,168.312 ; 49.89,168.312 ccw(c50.252,168.312) v1@49.996,168.056 ; 49.89,168.312 ccw(c50.252,168.312) v1@49.996,168.056 ; 49.89,168.312 ccw(c50.252,168.312) v1@49.996,168.056 ; 62.584,174.506 cw(c62.328,174.25) v1@62.69,174.25 ; 62.584,174.506 ccw(c62.84,174.762) v1@62.84,174.4 ; 62.584,174.506 cw(c62.338,174.254) v1@62.69,174.251 ; 62.584,174.506 ccw(c62.836,174.752) v1@62.839,174.4 ; 62.584,174.506 ccw(c62.84,174.762) v1@62.84,174.4 ; 62.584,174.506 cw(c62.328,174.25) v1@62.69,174.25 ; 62.584,174.506 ccw(c62.836,174.752) v1@62.839,174.4 ; 62.584,174.506 ccw(c62.84,174.762) v1@62.84,174.4 ; 62.584,174.506 cw(c62.328,174.25) v1@62.69,174.25 ; 62.584,174.506 ccw(c62.836,174.752) v1@62.839,174.4 ; 62.584,174.506 cw(c62.338,174.254) v1@62.69,174.251 ; 62.584,174.506 ccw(c62.84,174.762) v1@62.84,174.4 ; 62.584,174.506 cw(c62.328,174.25) v1@62.69,174.25 ; 62.584,174.506 cw(c62.338,174.254) v1@62.69,174.251 ; 62.584,174.506 ccw(c62.84,174.762) v1@62.84,174.4 ; 62.584,174.506 cw(c62.328,174.25) v1@62.69,174.25 ; 62.59,174.5 cw(c62.358,174.262) v1@62.69,174.254 ; 62.59,174.5 ccw(c62.828,174.732) v1@62.836,174.4 ; 62.59,174.5 ccw(c62.828,174.732) v1@62.836,174.4 ; 62.59,174.5 ccw(c62.831,174.741) v1@62.837,174.4 ; 62.59,174.5 cw(c62.348,174.258) v1@62.69,174.253 ; 62.59,174.5 cw(c62.359,174.263) 62.69,174.254 ccw(c62.359,174.263) 62.59,174.5 ; 62.59,174.5 ccw(c62.828,174.732) v1@62.836,174.4 ; 62.59,174.5 cw(c62.358,174.262) v1@62.69,174.254 ; 62.59,174.5 ccw(c62.827,174.731) 62.836,174.4 cw(c62.827,174.731) 62.59,174.5 ; 62.59,174.5 ccw(c62.832,174.742) v1@62.837,174.4 ; 62.59,174.5 cw(c62.358,174.262) v1@62.69,174.254 ; 62.591,174.499 ccw(c62.834,174.748) v1@62.838,174.4 ; 62.591,174.499 ccw(c62.834,174.748) v1@62.838,174.4 ; 62.591,174.499 cw(c62.342,174.256) v1@62.69,174.252 ; 62.591,174.499 cw(c62.342,174.256) v1@62.69,174.252 ; 62.591,174.499 cw(c62.342,174.256) v1@62.69,174.252 ; 62.591,174.499 cw(c62.342,174.256) v1@62.69,174.252 ; 62.591,174.499 cw(c62.342,174.256) v1@62.69,174.252 ; 62.591,174.499 cw(c62.342,174.256) v1@62.69,174.252 ; 62.591,174.499 ccw(c62.834,174.748) v1@62.838,174.4 ; 62.591,174.499 ccw(c62.834,174.748) v1@62.838,174.4 ; 62.591,174.499 ccw(c62.834,174.748) v1@62.838,174.4 ; 62.591,174.499 ccw(c62.834,174.748) v1@62.838,174.4 ; v1@62.69,174.252 ccw(c62.345,174.257) 62.592,174.498 cw(c62.345,174.257) v1@62.69,174.252 ; 62.694,181.917 cw(c61.759,180.981) D2.2@63.082,180.963 ; 62.694,181.917 cw(c61.759,180.981) D2.2@63.082,180.963 ; 62.694,181.917 cw(c61.759,180.981) D2.2@63.082,180.963 ; v1@62.838,174.4 cw(c62.833,174.745) 62.592,174.498 ccw(c62.833,174.745) v1@62.838,174.4 ; 62.862,180.429 ccw(c62.333,180.958) D2.2@63.082,180.958 ; 62.862,180.429 ccw(c62.333,180.958) D2.2@63.082,180.958 ; 62.862,180.429 ccw(c62.333,180.958) D2.2@63.082,180.958 ; 62.887,180.453 cw(c63.382,179.958) D2.2@63.382,180.658 ; 62.887,180.453 cw(c63.382,179.958) D2.2@63.382,180.658 ; 62.887,180.453 cw(c63.382,179.958) D2.2@63.382,180.658 ; 63.029,181.582 cw(c62.419,180.972) D2.2@63.282,180.96 ; 63.029,181.582 cw(c62.419,180.972) D2.2@63.282,180.96 ; 63.029,181.582 cw(c62.419,180.972) D2.2@63.282,180.96 ; D2.2@63.124,181.112 ccw(c62.785,181.314) 63.168,181.411 ; D2.2@63.124,181.112 ccw(c62.785,181.314) 63.168,181.411 ; D2.2@63.124,181.112 ccw(c62.785,181.314) 63.168,181.411 ; 64.399,185.215 cw(c63.87,184.686) D1.1@64.618,184.686 ; 64.399,185.215 cw(c63.87,184.686) D1.1@64.618,184.686 ; 64.399,185.215 cw(c63.87,184.686) D1.1@64.618,184.686 ; 64.423,185.191 ccw(c64.918,185.686) D1.1@64.918,184.986 ; 64.423,185.191 ccw(c64.918,185.686) D1.1@64.918,184.986 ; 64.423,185.191 ccw(c64.918,185.686) D1.1@64.918,184.986 ; D1.1@64.558,184.911 ccw(c64.992,185.028) D1.1@64.897,184.588 ; D1.1@64.558,184.911 ccw(c64.992,185.028) D1.1@64.897,184.588 ; D1.1@64.558,184.911 ccw(c64.992,185.028) D1.1@64.897,184.588 ; 62.89,181.719 ccw(c63.898,181.974) 63.427,181.048 cw(c63.898,181.974) 62.89,181.719 ; D2.2@62.998,181.292 ccw(c63.633,181.453) 63.336,180.869 cw(c63.633,181.453) D2.2@62.998,181.292 ; D2.2@63.021,180.733 cw(c63.456,180.616) 63.36,181.056 ccw(c63.456,180.616) D2.2@63.021,180.733
  power w0.2: v1(49.89,167.95) 49.89,168.028 50.362,168.5 52.52,168.5 53.08,169.06 53.08,172.776 54.014,173.71 62,173.71 62.54,174.25 ; v1(62.84,174.25) 62.54,174.25 ; v1@50.04,167.95 cw(c50.59,167.95) 50.201,168.339 ; v1@50.04,167.95 cw(c50.59,167.95) 50.201,168.339 ; v1@50.04,167.95 cw(c50.59,167.95) 50.201,168.339 ; 62.072,173.782 cw(c62.84,173.014) v1@62.84,174.1 ; 62.072,173.782 cw(c62.84,173.014) v1@62.84,174.1 ; 62.072,173.782 cw(c62.84,173.014) v1@62.84,174.1 ; 62.413,174.123 cw(c62.84,173.696) v1@62.84,174.3 ; 62.413,174.123 cw(c62.84,173.696) v1@62.84,174.3 ; 62.413,174.123 cw(c62.84,173.696) v1@62.84,174.3 ; 62.54,174.25 cw(c62.54,174.025) v1@62.72,174.16 ; 62.54,174.25 ccw(c62.54,174.475) v1@62.72,174.34 ; 62.54,174.25 ccw(c62.54,174.475) v1@62.72,174.34 ; 62.54,174.25 cw(c62.54,174.025) v1@62.72,174.16 ; 62.54,174.25 ccw(c62.54,174.475) v1@62.72,174.34 ; 62.54,174.25 cw(c62.54,174.025) v1@62.72,174.16 ; 62.656,174.051 ccw(c62.559,174.412) v1@62.883,174.225 ; 62.656,174.051 ccw(c62.559,174.412) v1@62.883,174.225 ; 62.656,174.051 ccw(c62.559,174.412) v1@62.883,174.225